# Altium PCB PCB1.PcbDoc
Units mm, origin at the board's own origin, x right, y up, seen from the top; angles counter-clockwise.
Board outline 100 x 50 mm, 2 copper layers (Top Layer, Bottom Layer); 28 components, 19 nets, 70 pads, 21 vias.
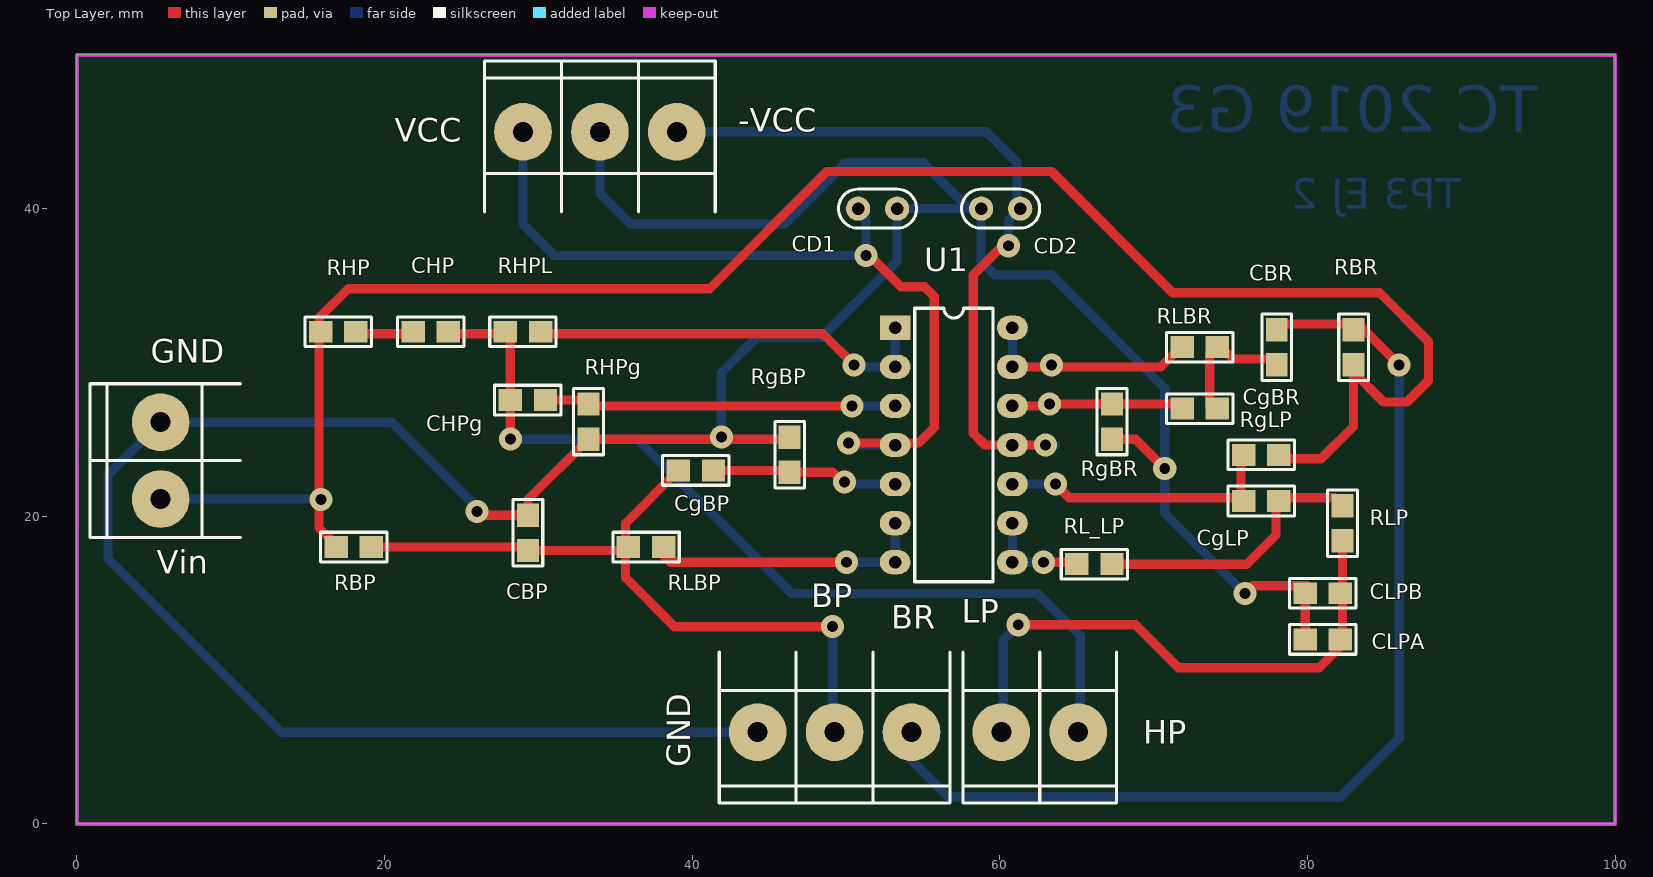
[diagram p0: Top Layer view]
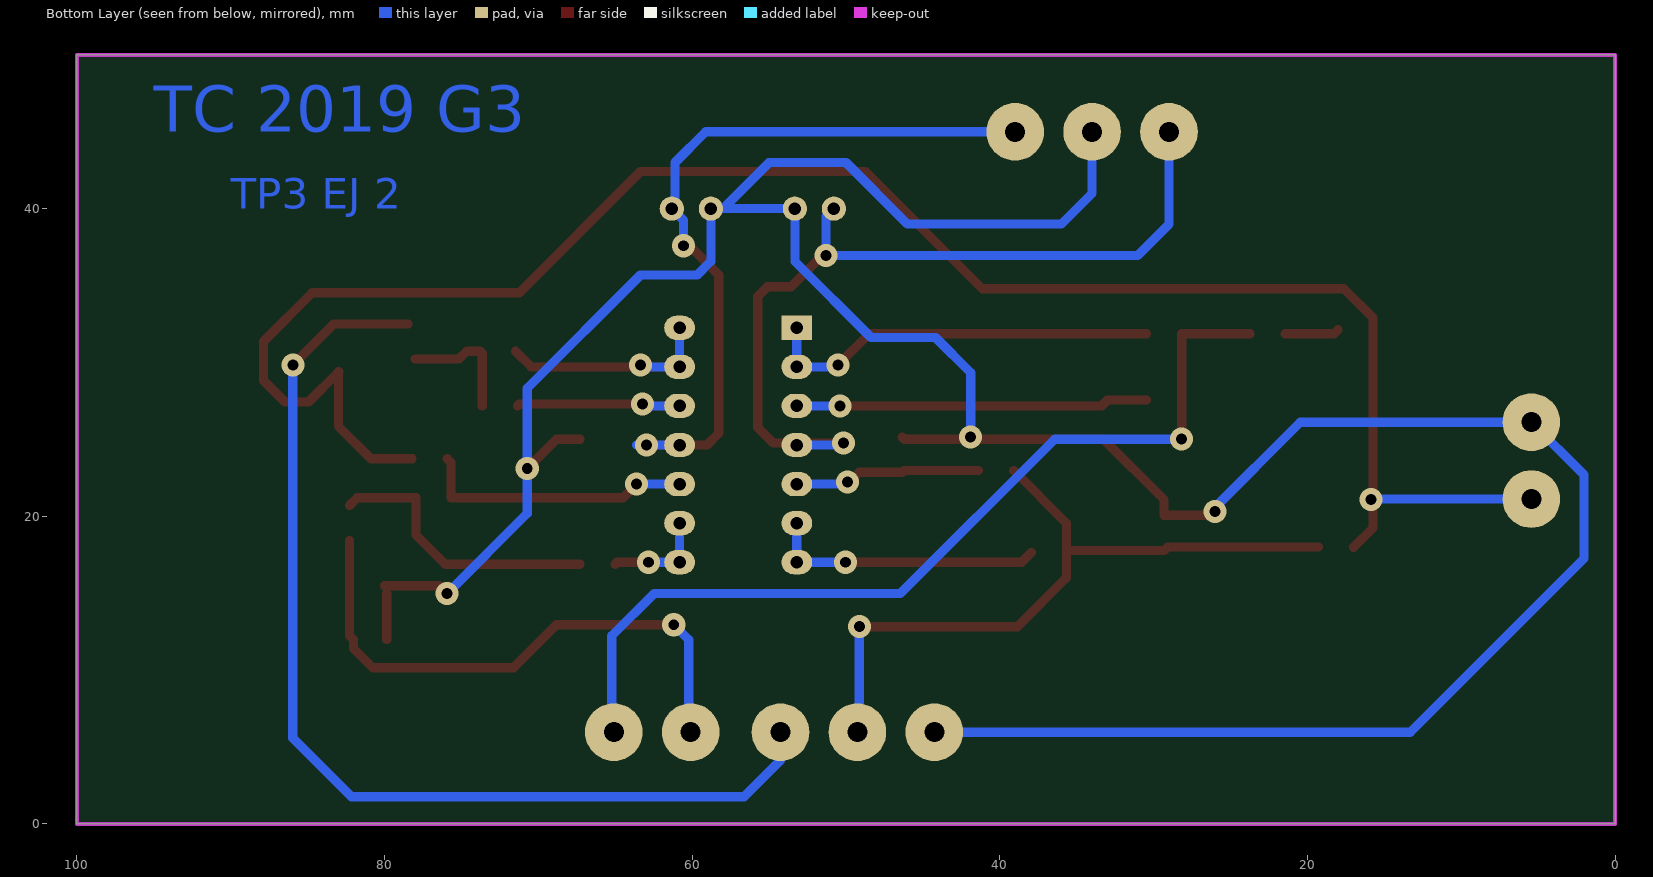
[diagram p1: Bottom Layer view, seen from below]
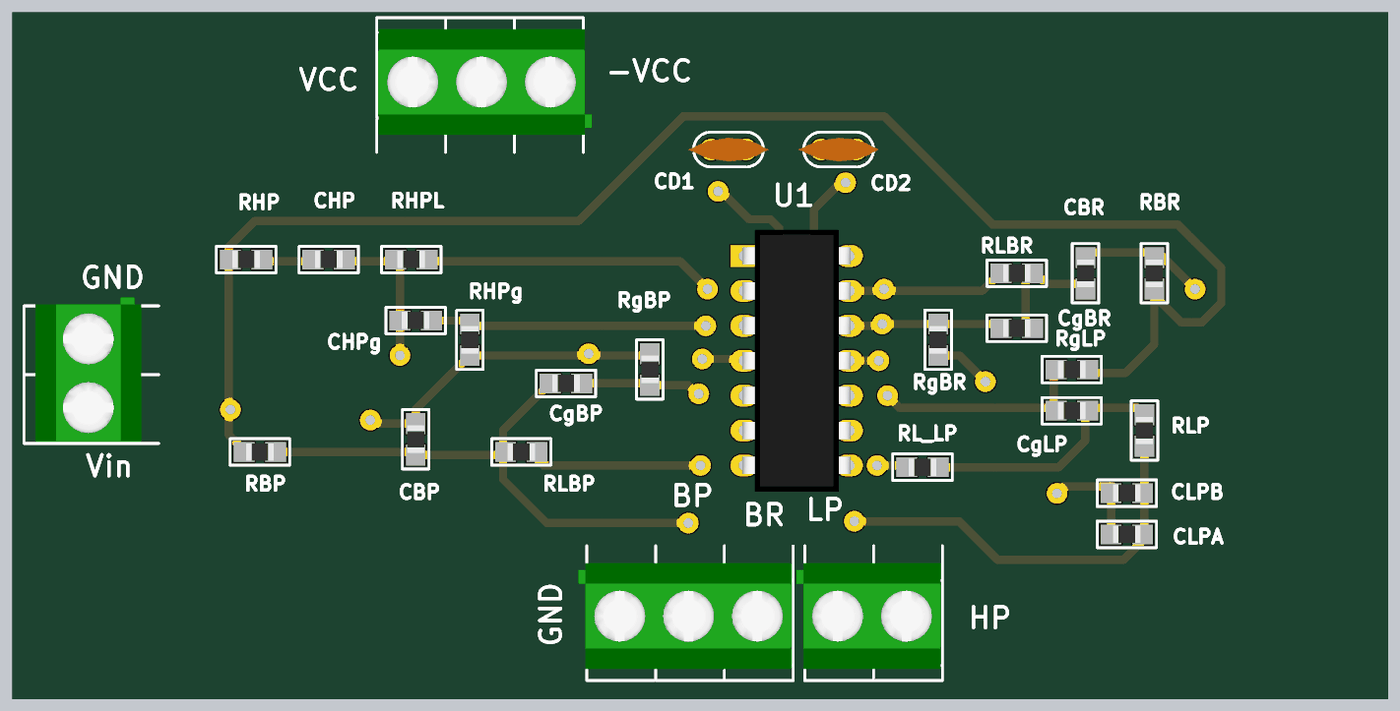
[diagram p2: 3D render of the assembled board from above, using the file's embedded part models]

## Layer stack, top to bottom
Top Solder: solder mask 0.0102, Solder Resist, Dk 3.5
Top Layer: signal copper 0.0356
Dielectric 1: dielectric 0.32, FR-4, Dk 4.8
Bottom Layer: signal copper 0.0356
Bottom Solder: solder mask 0.0102, Solder Resist, Dk 3.5

## Board outline
0,0 100,0 100,50 0,50

## Design rules (kind name [scope] priority, off if disabled: settings)
Clearance [All] p1: gap=0.254
PolygonConnect [All] p1: connectstyle=Relief reliefconductorwidth=0.254 reliefentries=4 polygonreliefangle="90 Angle" airgapwidth=0.254
RoutingVias [All] p1: holewidth=0.711 width=1.27 viastyle="Through Hole" minholewidth=0.711 minwidth=1.27 maxholewidth=0.711 maxwidth=1.27
SolderMaskExpansion [All] p1: expansion=0.102
Width [All] p1: maxlimit=0.6 minlimit=0.6 preferedwidth=0.6
30 further rules are at their usual default settings.

## Components (designator, comment, footprint, x,y, rotation, side; value= is the part's Value field where it differs from the comment)
CBP "12n" 0805 29.321,18.923 r270 top
CBR "4.7n" 0805 78,31 r270 top
CD1 "100n" CAP100 52.054,40.005 r180 top
CD2 "100n" CAP100 60.055,40.005 r180 top
CgBP "10n" 0805 40.243,22.987 r0 top
CgBR "10n" 0805 73,27 r180 top
CgLP "1n" 0805 77,21 r180 top
CHP "68n" 0805 23,32 r0 top
CHPg "1n" 0805 29.321,27.559 r0 top
CLPA "150n" 0805 81,12 r0 top
CLPB "680n" 0805 81,15 r0 top
GND "BORNERA 3" BORNERA3 49.26,5.969 r90 top (schematic designator OUT2)
HP "BORNERA 2" BORNERA2 62.595,5.969 r90 top (schematic designator OUT1)
RBP "12k" 0805 18,18 r0 top
RBR "20k" 0805 83,31 r90 top
RgBP "1M" 0805 46.339,24.003 r270 top
RgBR "1M" 0805 67.294,26.162 r90 top
RgLP "200k" 0805 77,24 r180 top
RHP "750" 0805 17,32 r0 top
RHPg "200k" 0805 33.258,26.162 r90 top
RHPL "51" 0805 29,32 r0 top
RL_LP "51" 0805 66.151,16.891 r180 top
RLBP "51" 0805 37,18 r0 top
RLBR "51" 0805 73,31 r180 top
RLP "130" 0805 82.28,19.558 r270 top
U1 "TL084ACD" DIP14 53.197,32.258 r0 top
VCC "BORNERA 3" BORNERA3 34,45 r270 top
Vin "BORNERA 2" BORNERA2 5.445,23.622 r0 top (schematic designator IN)

## Footprints (in the part's own frame and the unit in brackets; to place one, negate y for a bottom-side part, rotate by r counter-clockwise, add the part's x,y. Pads: shape width x height; smd on the part's side, far side on the other; paste and mask are expansions set on the pad)
0805 [mil] "Pasivo 0805"
  rect 60x56 smd: 1(-45,0) 2(45,0)
  silkscreen extent -85,-38 85,38, body extent -40,-25 39,25, height 15
BORNERA2 [mm] "Bornera con Tornillos 5mm separación"
  round 3.75 hole 1.3: 1(0,2.5) 2(0,-2.5)
  silkscreen extent -4.6,-5 5.2,5, body extent -3.76,-4.89 3.94,5.61, height 10
BORNERA3 [mm] "Bornera con Tornillos 5mm separación"
  round 3.75 hole 1.3: 1(0,5) 2(0,0) 3(0,-5)
  silkscreen extent -4.6,-7.5 5.2,7.5, body extent -3.76,-7.39 3.94,8.11, height 10.05
CAP100 [mil]
  round 62 hole 32: 1(-50,0) 2(50,0)
  silkscreen extent -100,-50 100,50, body extent -115,-33 115,34, height 241
DIP14 [mil]
  rect 78.74x62 hole 32: 1(0,0)
  oval 78.74x62 hole 32: 2(0,-100) 3(0,-200) 4(0,-300) 5(0,-400) 6(0,-500) 7(0,-600) 8(300,-600) 9(300,-500) 10(300,-400) 11(300,-300) 12(300,-200) 13(300,-100) 14(300,0)
  silkscreen extent 50,-650 250,50, body extent -5,-675 305,75, height 165

## Part data
CBP CBR CD1 CD2 CgBP CgBR CgLP CHP CHPg CLPA CLPB: library part CAP
RBP RBR RgBP RgBR RgLP RHP RHPg RHPL RL_LP RLBP RLBR RLP: library part RES
U1: "JFET-Input Operational Amplifier, 7 to 36 V, 0 to 70 degC, 14-pin SOIC (D14), Green (RoHS & no Sb/Br)"

## Via types
v1: diameter 1.5, hole 0.711, Top Layer to Bottom Layer, 21 vias

## Nets (pads, with @x,y where several pads share a name; then routed paths per layer and width w, separated by ;. In a path a pad name is that pad's centre, name@x,y a point inside that pad or via, vN(x,y) a via of type N, cw(c..) or ccw(c..) an arc to the next point about the centre after c; other vN are vias at no path point)
-VCC: CD2.1 U1.11 VCC.1 | length 49.9
  Top Layer w0.6: v1@60.436,37.846 58.277,35.687 58.277,25.4 59.039,24.638 U1.11 v1(62.976,24.638)
  Bottom Layer w0.6: VCC.1 59.118,45 61.118,43 61.118,40.212 CD2.1 60.563,39.243 v1(60.563,37.592) ; U1.11 v1@63.611,24.638
BP: CBP.2 CgBP.1 GND.2 RBP.2 RLBP.1 | length 46.6
  Top Layer w0.6: RBP.2@19.288,18 29.101,18 CBP.2 35.544,17.78 RLBP.1@35.671,17.653 ; CgBP.1 35.671,19.558 RLBP.1@35.671,17.653 ; v1(49.133,12.827) 38.846,12.827 35.671,16.002 RLBP.1@35.671,17.653
  Bottom Layer w0.6: v1(49.133,12.827) 49.133,6.096 GND.2
BR: CBR.1 GND.3 RBR.2 | length 68.9
  Top Layer w0.6: CBR.1@78.47,32.512 83.296,32.512 83.55,32.258 v1(85.963,29.845)
  Bottom Layer w0.6: GND.3 54.26,4.144 56.626,1.778 82.153,1.778 85.963,5.588 v1(85.963,29.845)
GND: CBP.1 CD1.1 CD2.2 CLPA.1 CLPB.1 GND.1 RgBP.1 RgBR.1 RHPg.1 VCC.2 Vin.1 | length 208.4
  Top Layer w0.6: v1(26.019,20.32) 26.273,20.066 CBP.1 29.321,21.082 RHPg.1 46.212,25.019 RgBP.1 ; RgBR.1 68.818,25.019 v1(70.723,23.114) ; v1@76.057,15.113 76.438,15.494 CLPB.1@79.994,15.494 ; CLPA.1 CLPB.1
  Bottom Layer w0.6: v1@26.273,20.32 20.471,26.122 Vin.1 2.016,22.693 2.016,17.272 13.319,5.969 GND.1 ; VCC.2 34,41 36,39 46,39 50,43 55,43 57.995,40.005 ; v1(41.894,25.146) 41.894,29.337 44.18,31.623 48.371,31.623 53.324,36.576 CD1.1 57.995,40.005 ; v1(75.93,14.986) 70.723,20.193 v1(70.723,23.114) 70.723,28.321 63.357,35.687 59.674,35.687 58.785,36.576 CD2.2 57.995,40.005
HP: CHP.2 CHPg.1 HP.2 RHPL.1 | length 59.5
  Top Layer w0.6: CHP.2@23.733,31.877 28.178,31.877 CHPg.1 v1(28.178,25.019)
  Bottom Layer w0.6: v1(28.178,25.019) 36.433,25.019 46.466,14.986 62.468,14.986 65.222,12.232 HP.2@65.222,6.35
LP: CLPA.2 CLPB.2 HP.1 RLP.2 | length 36.6
  Top Layer w0.6: v1(61.198,12.954) 68.818,12.954 71.612,10.16 80.756,10.16 82.026,11.43 82.026,12 82.28,12.254 RLP.2
  Bottom Layer w0.6: HP.1@60.222,6.35 60.222,11.978 v1(61.198,12.954)
NetCBR_2: CBR.2 CgBR.1 RLBR.1 | length 7.9
  Top Layer w0.6: CgBR.1@73.644,27.178 RLBR.1@73.644,30.607 ; RLBR.1@73.771,30.734 74.66,30.734 75.168,30.226 CBR.2@78,30.226
NetCgBP_2: CgBP.2 RgBP.2 U1.5 | length 12.2
  Top Layer w0.6: CgBP.2 46.212,22.987 RgBP.2 49.133,22.86 v1@49.895,22.098
  Bottom Layer w0.6: v1(49.895,22.225) 50.022,22.098 U1.5
NetCgBR_2: CgBR.2 RgBR.2 U1.12 | length 13.1
  Top Layer w0.6: U1.12 63.23,27.178 63.357,27.305 RgBR.2 71.231,27.305 CgBR.2@71.358,27.178
  Bottom Layer w0.6: U1.12 63.103,27.178 v1(63.23,27.305)
NetCgLP_1: CgLP.1 RL_LP.1 RLP.1 | length 18.4
  Top Layer w0.6: RL_LP.1 76.057,16.891 77.962,18.796 77.962,21.209 81.772,21.209 RLP.1
NetCgLP_2: CgLP.2 RgLP.2 U1.10 | length 17.9
  Top Layer w0.6: v1(63.611,22.098) 64.5,21.209 75.676,21.209 75.676,23.495 RgLP.2@75.93,23.749
  Bottom Layer w0.6: U1.10 v1(63.611,22.098)
NetCHP_1: CHP.1 RHP.2 | length 3.5
  Top Layer w0.6: RHP.2@18.018,32.131 18.272,31.877 CHP.1@21.447,31.877
NetCHPg_2: CHPg.2 RHPg.2 U1.3 | length 23.3
  Top Layer w0.6: CHPg.2 33.004,27.559 RHPg.2 33.385,27.178 v1(50.403,27.178)
  Bottom Layer w0.6: v1@50.022,27.178 U1.3
NetRHPL_2: RHPL.2 U1.1 U1.2 | length 26.2
  Top Layer w0.6: RHPL.2@30.464,31.877 48.498,31.877 v1(50.53,29.845)
  Bottom Layer w0.6: v1(50.53,29.845) 50.657,29.718 U1.2 U1.1
NetRL_LP_2: RL_LP.2 U1.8 U1.9 | length 6.8
  Top Layer w0.6: v1(62.849,17.018) 64.881,17.018 RL_LP.2
  Bottom Layer w0.6: U1.9 U1.8 v1(62.849,17.018)
NetRLBP_2: RLBP.2 U1.6 U1.7 | length 18
  Top Layer w0.6: RLBP.2@37.957,17.653 38.592,17.018 v1(50.022,17.018)
  Bottom Layer w0.6: v1(50.022,17.018) U1.7 U1.6
NetRLBR_2: RLBR.2 U1.13 U1.14 | length 16
  Top Layer w0.6: U1.13 70.469,29.718 RLBR.2@71.485,30.734
  Bottom Layer w0.6: U1.14 U1.13 62.976,29.718 v1@63.103,29.591
  other v1: 63.357,29.845
VCC: CD1.2 U1.4 VCC.3 | length 55.9
  Top Layer w0.6: v1(50.149,24.765) 54.721,24.765 55.737,25.781 55.737,34.29 55.102,34.925 53.578,34.925 v1@51.483,37.02
  Bottom Layer w0.6: VCC.3 29,39 31.043,36.957 v1(51.292,36.957) 51.292,39.497 CD1.2 CD1.2@51.118,40.339 ; v1(50.149,24.765) 50.276,24.638 U1.4
VI: RBP.1 RBR.1 RgLP.1 RHP.1 Vin.2 | length 124.3
  Top Layer w0.6: RBP.1@17.002,17.998 15.732,19.268 15.732,32.893 17.637,34.798 41.132,34.798 48.752,42.418 63.357,42.418 71.231,34.544 84.693,34.544 87.868,31.369 87.868,28.829 86.471,27.432 84.947,27.432 RBR.1@82.979,29.4 ; RgLP.1@78.216,23.749 80.883,23.749 83,25.866 RBR.1@83,29.422
  Bottom Layer w0.6: Vin.2 v1@15.645,21.122
  other v1: 15.859,21.082

## Keep-outs
Keep-Out Layer:
  the board outline again, w0.254

## Other copper
Bottom Layer:
  text "TC 2019 G3" at 95,45 h3
  text "TP3 EJ 2" at 90,40 h2

## Silkscreen, mask and mechanical layers (free items; w line width, h text height)
Top Overlay:
  text "-VCC" at 43,45 h1.52
  text "GND" at 4.81,29.972 h1.52
  text "BP" at 47.736,14.097 h1.52
  text "LP" at 57.515,13.081 h1.52
  text "BR" at 52.943,12.7 h1.52